# EAGLE board jumpers (EAGLE 7.7.0)

Size 37 x 36 mm. Coordinates in mm from the lower left corner, seen from the top.
Outline: 0,0 37,0 37,36 0,36 0,0
Copper layers (1*16): Top 0.035mm / dielectric 1.5mm / Bottom 0.035mm
Design rules "default": minimum track width 10mil, minimum drill 24mil, track to track 8mil, track to pad 8mil, pad to pad 8mil, via to via 8mil, smd to smd 8mil, copper to edge 40mil, drill to drill 8mil, minimum pad ring 10mil, minimum via ring 8mil, stop-mask expansion 4mil, vias tented up to drill 0mil, thermal gap 10mil

## Footprints (pad centres in the part's own frame; a part is rotated, then mirrored left to right if it is on the bottom)
05 = drill 0.813 pad 1.6 octagon: 1 -2.54,0; 2 2.54,0
07 = drill 0.813 pad 1.6 octagon: 1 -3.81,0; 2 3.81,0
10 = drill 0.813 pad 1.6 octagon: 1 -5.08,0; 2 5.08,0
10E = drill 0.813 pad 1.778 octagon: 1 -5.08,0; 2 5.08,0
12 = drill 0.813 pad 1.6 octagon: 1 -6.35,0; 2 6.35,0
15 = drill 0.813 pad 1.6 octagon: 1 -7.62,0; 2 7.62,0
15S = drill 1.016 pad 3.175 octagon: 1 -7.62,0; 2 7.62,0
20 = drill 0.813 pad 1.6 octagon: 1 -10.16,0; 2 10.16,0
25 = drill 0.813 pad 1.6 octagon: 1 -12.7,0; 2 12.7,0

## Placement (x,y rotation side)
E$1  [05]  5,6 0 top
E$2  [07]  6,9 0 top
E$3  [10]  8,13 0 top
E$4  [10E]  8,16 0 top
E$5  [12]  9,19 0 top
E$6  [15]  11,23 0 top
E$7  [15S]  24,14 90 top
E$8  [20]  13,28 0 top
E$9  [25]  16,31 180 top

## Library data of the parts
E$1-E$9 = jumper